# Altium PCB Beacon.PcbDoc
Units mm, origin at the board's own origin, x right, y up, seen from the top; angles counter-clockwise.
Board outline 47.6 x 56 mm, 2 copper layers (Top Layer, Bottom Layer); 50 components, 53 nets, 164 pads, 154 vias.
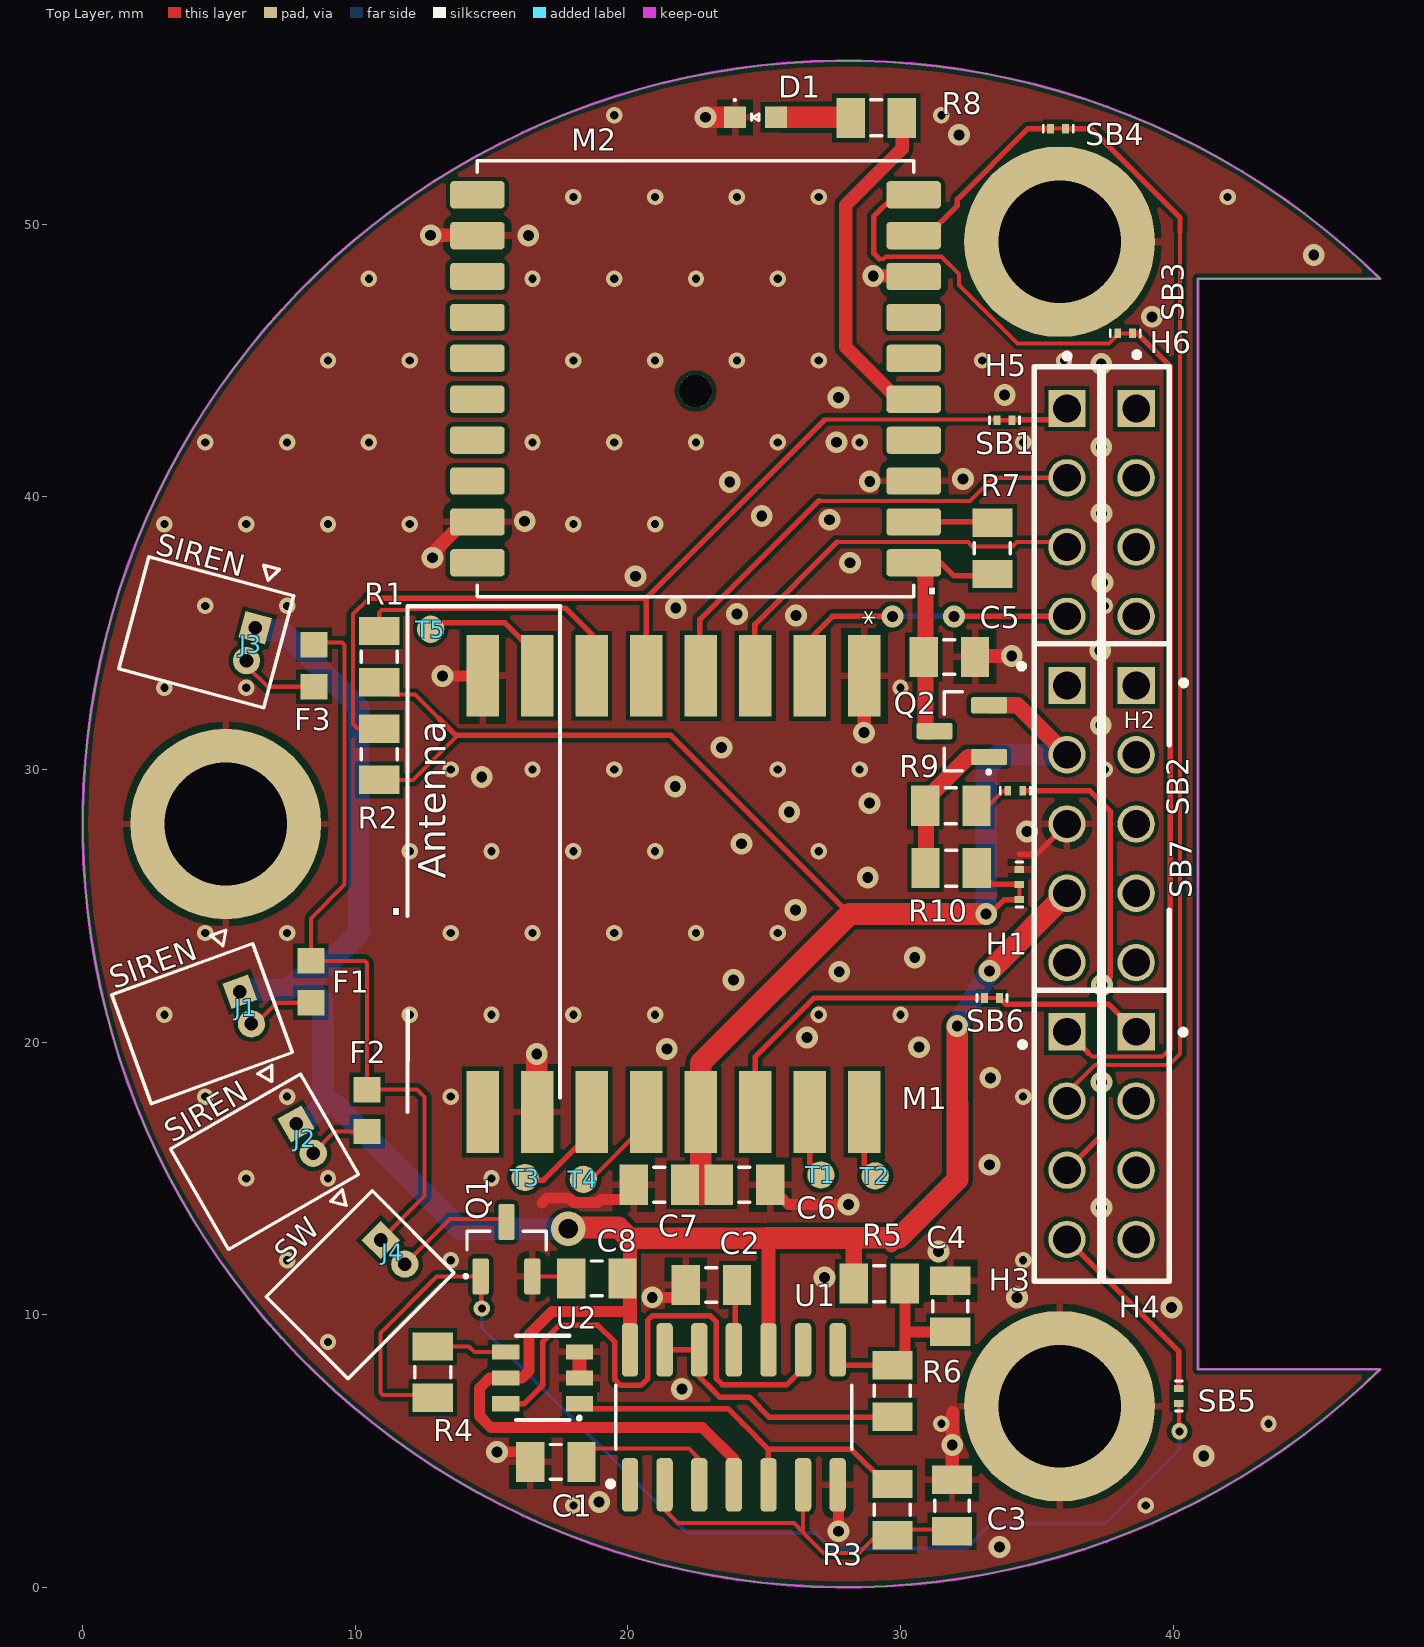
[diagram p0: Top Layer view]
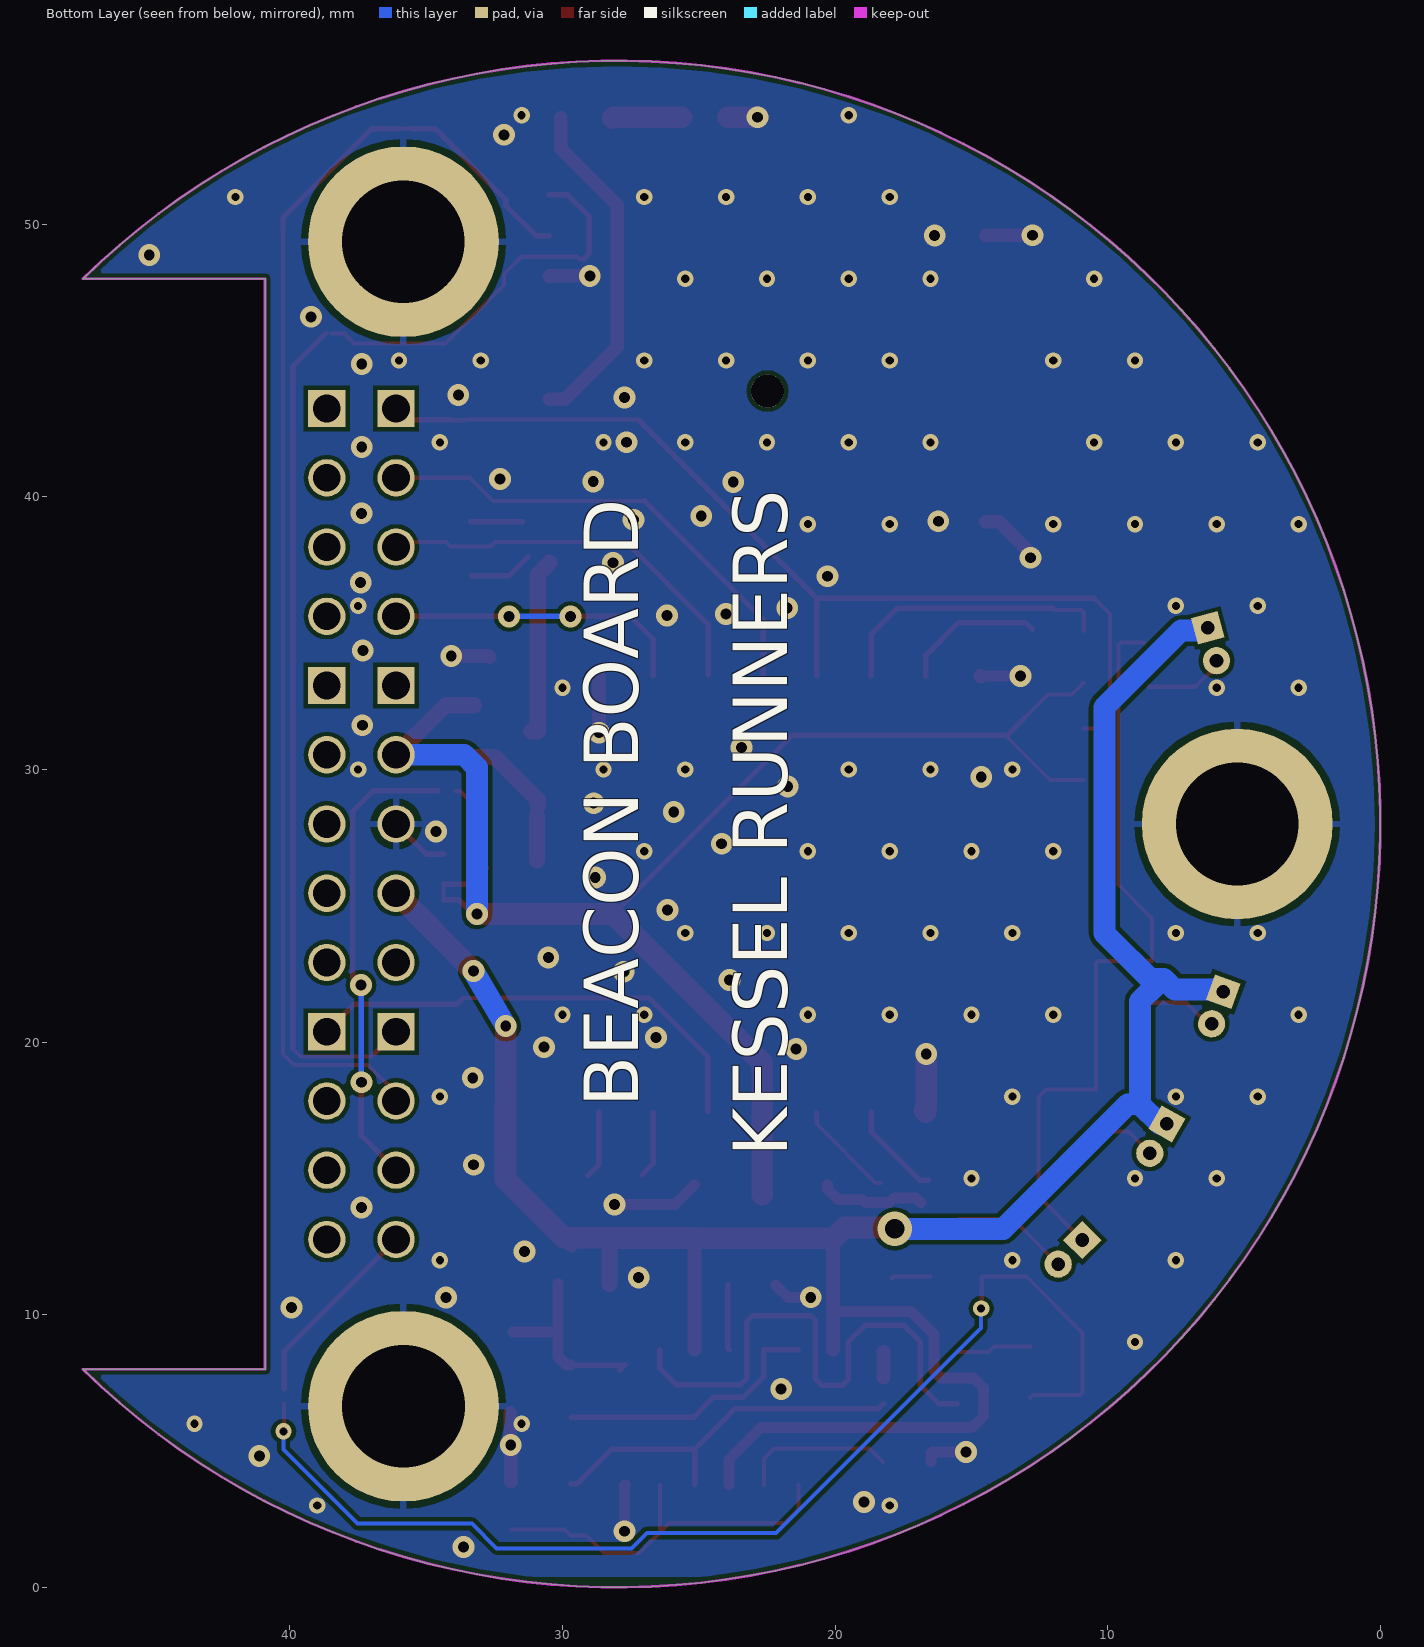
[diagram p1: Bottom Layer view, seen from below]

## Layer stack, top to bottom
Top Solder: solder mask 0.0102, Solder Resist, Dk 3.5
Top Layer: signal copper 0.0356
Dielectric 1: dielectric 0.32, FR-4, Dk 4.8
Bottom Layer: signal copper 0.0356
Bottom Solder: solder mask 0.0102, Solder Resist, Dk 3.5

## Board outline
47.596,8 cw(c28,28) 47.596,48 47.6,48 40.913,48 40.913,8

## Design rules (kind name [scope] priority, off if disabled: settings)
Clearance [All] p1: gap=0.152 ignorepadtopadclearanceinfootprint=FALSE
HoleSize [All] p1: absolutevalues=TRUE maxlimit=6.2 minlimit=0.3 maxpercent=80.000 minpercent=20.000
MinimumAnnularRing [All] p1: minimumring=0.15
MinimumSolderMaskSliver [All] p1: minsoldermaskwidth=0.1
PolygonConnect ViaConnect [IsVia] p1: connectstyle=Direct reliefconductorwidth=0.254 reliefentries=4 polygonreliefangle="90 Angle" airgapwidth=0.254
PolygonConnect [All] p2: connectstyle=Relief reliefconductorwidth=0.254 reliefentries=4 polygonreliefangle="90 Angle" airgapwidth=0.254
RoutingVias [All] p1: holewidth=0.3 width=0.6 viastyle="Through Hole" minholewidth=0.3 minwidth=0.5 maxholewidth=1 maxwidth=5
SilkToSilkClearance [All] p1: silktosilkclearance=0.1
SilkToSolderMaskClearance [IsPad] p1: minsilkscreentomaskgap=0.1 clearancetoexposedcopper=TRUE
SolderMaskExpansion [All] p1: expansion=0.051 istentingtop=FALSE
SupplyNets "Schematic Supply Nets_5" [InNet('GPS_3V3')] p1: voltage=0.000
SupplyNets "Schematic Supply Nets_4" [InNet('5V')] p2: voltage=0.000
SupplyNets "Schematic Supply Nets_3" [InNet('Vbat')] p3: voltage=0.000
SupplyNets "Schematic Supply Nets_2" [InNet('3V3')] p4: voltage=0.000
SupplyNets "Schematic Supply Nets_1" [InNet('GND')] p5: voltage=0.000
SupplyNets "Schematic Supply Nets" [InNet('1V8')] p6: voltage=0.000
Width [All] p1: maxlimit=25.4 minlimit=0.15 preferedwidth=0.3
26 further rules are at their usual default settings.

## Components (designator, comment, footprint, x,y, rotation, side; value= is the part's Value field where it differs from the comment)
C1 "220nF" CAPACITOR_0805_2012M-70N 17.361,4.604 r0 top
C2 "220nF" CAPACITOR_0805_2012M-70N 23.064,11.093 r0 top
C3 "1nF" CAPACITOR_0805_2012M-70N 31.891,2.999 r270 top
C4 "1uF" CAPACITOR_0805_2012M-70N 31.826,10.309 r270 top
C5 "22uF" CAPACITOR_0805_2012M-70N 31.795,34.128 r180 top
C6 "22uF" CAPACITOR_0805_2012M-70N 24.278,14.766 r0 top
C7 "220nF" CAPACITOR_0805_2012M-70N 21.156,14.767 r180 top
C8 "220nF" CAPACITOR_0805_2012M-70N 18.864,11.335 r0 top
D1 "LTST-C190 Series" LED_0603_1608M_0.80mm 24.684,53.922 r0 top
F1 "C2Q-375" FUSC1608X56N 8.371,22.211 r90 top
F2 "C2Q-375" FUSC1608X56N 10.438,17.488 r90 top
F3 "C2Q-375" FUSC1608X56N 8.49,33.805 r90 top
H1 "SSQ-105-03-S-S" SAMTEC_SSQ-105-03-S-S 36.107,28 r270 top
H2 "SSQ-105-03-S-S" SAMTEC_SSQ-105-03-S-S 38.647,28 r270 top
H3 "SSQ-104-02-S-S" *SAMTEC_SSQ-104-02-S-S_SSQ-104-02-S-S(Primary)#1 36.107,16.57 r270 top
H4 "SSQ-104-02-S-S" *SAMTEC_SSQ-104-02-S-S_SSQ-104-02-S-S(Primary)#1 38.647,16.57 r270 top
H5 "SSQ-104-02-S-S" *SAMTEC_SSQ-104-02-S-S_SSQ-104-02-S-S(Primary)#2 36.107,39.43 r270 top
H6 "SSQ-104-02-S-S" *SAMTEC_SSQ-104-02-S-S_SSQ-104-02-S-S(Primary)#2 38.647,39.43 r270 top
J1 "0530480210" MOLEX_0530480210 5.977,21.259 r110 top
J2 "0530480210" MOLEX_0530480210 8.146,16.46 r120 top
J3 "0530480210" MOLEX_0530480210 6.174,34.594 r75 top
J4 "0530480210" MOLEX_0530480210 11.377,12.297 r135 top
M1 "LORA127X-C1" LoRa127X-C1 13.674,33.435 r270 top
M2 "CD-PA1616D" XCVR_CD-PA1616D 22.482,44.331 r180 top
Q1 "AS2312" SOT23-3N-1.15mm 15.549,12.403 r90 top
Q2 "SSM3J328R,LF" SOT23F-3-0.8mm 32.25,31.407 r180 top
R1 "180k" Resistor_0805_2012M-50N 10.881,34.137 r270 top
R2 "180k" Resistor_0805_2012M-50N 10.881,30.557 r270 top
R3 "180k" Resistor_0805_2012M-50N 29.703,2.848 r90 top
R4 "1k" Resistor_0805_2012M-50N 12.842,7.895 r270 top
R5 "1Meg" Resistor_0805_2012M-50N 29.22,11.139 r180 top
R6 "39k" Resistor_0805_2012M-50N 29.703,7.202 r270 top
R7 "180k" Resistor_0805_2012M-50N 33.372,38.11 r270 top
R8 "1k" Resistor_0805_2012M-50N 29.11,53.901 r0 top
R9 "1k" Resistor_0805_2012M-50N 31.85,28.67 r0 top
R10 "39k" Resistor_0805_2012M-50N 31.855,26.379 r180 top
SB1 "Solder Jumper Normally Closed 0201" "SOLDER BRIDGE CLOSED 0201" 33.814,42.81 r0 top net-tie
SB2 "Solder Jumper Normally Open 0201" "SOLDER BRIDGE OPEN 0201" 34.209,29.217 r0 top
SB3 "Solder Jumper Normally Closed 0201" "SOLDER BRIDGE CLOSED 0201" 38.242,45.996 r0 top net-tie
SB4 "Solder Jumper Normally Closed 0201" "SOLDER BRIDGE CLOSED 0201" 35.783,53.507 r0 top net-tie
SB5 "Solder Jumper Normally Open 0201" "SOLDER BRIDGE OPEN 0201" 40.213,7.016 r90 top
SB6 "Solder Jumper Normally Closed 0201" "SOLDER BRIDGE CLOSED 0201" 33.357,21.618 r0 top net-tie
SB7 "Solder Jumper 3-pin Left connected 0201" "SOLDER BRIDGE 3-PIN LEFT SHORTED 0201" 34.363,25.783 r90 top net-tie
T1 "Test Pad" "TEST PAD"#1 27.081,15.125 r0 top
T2 "Test Pad" "TEST PAD"#1 29.074,15.091 r0 top
T3 "Test Pad" "TEST PAD"#1 16.231,15.032 r0 top
T4 "Test Pad" "TEST PAD"#1 18.368,14.964 r0 top
T5 "Test Pad" "TEST PAD"#2 12.768,35.144 r0 top
U1 "TLC556CDR" SOIC-14N-3.9mmBody-1.75mm 23.887,6.234 r90 top
U2 "74LVC1G97W6-7" SOT23-6N-1.4mm 16.873,7.681 r180 top

## Footprints (in the part's own frame and the unit in brackets; to place one, negate y for a bottom-side part, rotate by r counter-clockwise, add the part's x,y. Pads: shape width x height; smd on the part's side, far side on the other; paste and mask are expansions set on the pad)
*SAMTEC_SSQ-104-02-S-S_SSQ-104-02-S-S(Primary)#1 [mm]
  rect 1.37x1.37 hole 1.02: 01(-3.81,0)
  round 1.37 hole 1.02 mask+0.051: 02(-1.27,0)
  round 1.37 hole 1.02: 03(1.27,0) 04(3.81,0)
  silkscreen extent -5.34,-1.73 5.34,1.2
*SAMTEC_SSQ-104-02-S-S_SSQ-104-02-S-S(Primary)#2 [mm]
  rect 1.37x1.37 hole 1.02: 01(-3.81,0)
  round 1.37 hole 1.02: 02(-1.27,0) 03(1.27,0) 04(3.81,0)
  silkscreen extent -5.83,-1.2 5.34,1.2
CAPACITOR_0805_2012M-70N [mm] "Capacitor, 0805 (2012 metric), 0.7mm high, nominal pads,"
  rect 1.04x1.47 smd mask+0.051: 1(-0.94,0) 2(0.94,0)
  silkscreen extent -0.2,-0.64 0.2,0.64, body extent -1,-0.73 1,0.73, height 1.23
FUSC1608X56N [mm]
  rect 0.93x0.99 smd: 1(-0.77,0) 2(0.77,0)
LED_0603_1608M_0.80mm [mm] "LED, 0603 (1608 metric), 0.8mm high"
  rect 0.8x0.8 smd mask+0.051: A(0.75,0) C(-0.75,0)
  silkscreen extent -0.79,-0.12 0.13,0.66, body extent -0.8,-0.4 0.8,0.4, height 0.8
LoRa127X-C1 [mm]
  rect 3x1.2 smd paste-10 mask+0: 1(0,15) 2(0,13) 3(0,11) 4(0,9) 5(0,7) 6(0,5) 7(0,3) 8(0,1) 9(16,1) 10(16,3) 11(16,5) 12(16,7) 13(16,9) 14(16,11) 15(16,13) 16(16,15)
  body extent 0,0 16,16, height 2.1
MOLEX_0530480210 [mm]
  rect 1x1 hole 0.5 mask+0.051: 1(0.625,0)
  round 1 hole 0.5 mask+0.051: 2(-0.625,0)
  silkscreen extent -2.13,-1.05 2.93,4.45, body extent -2.13,-1.08 2.12,4.42, height 3.56
Resistor_0805_2012M-50N [mm] "Resistor, 0805 (2012 metric), nominal pads"
  rect 1.04x1.47 smd mask+0.051: 1(-0.94,0) 2(0.94,0)
  silkscreen extent -0.2,-0.66 0.2,0.66, body extent -1,-0.63 1,0.62, height 0.5
SAMTEC_SSQ-105-03-S-S [mm]
  rect 1.37x1.37 hole 1.02: 1(-5.08,0)
  round 1.37 hole 1.02: 2(-2.54,0) 3(0,0) 4(2.54,0)
  round 1.37 hole 1.02 mask+0.051: 5(5.08,0)
  silkscreen extent -6.61,-1.76 6.61,1.2, body extent -6.6,-1.21 6.6,1.21, height 8.51
SOIC-14N-3.9mmBody-1.75mm [mm] "14-SOIC, 3.9mm body width, nominal pads, 1.75mm high"
  rrect50% 1.97x0.6 smd: 1(-2.475,3.81) 2(-2.475,2.54) 3(-2.475,1.27) 4(-2.475,0) 5(-2.475,-1.27) 6(-2.475,-2.54) 7(-2.475,-3.81) 8(2.475,-3.81) 9(2.475,-2.54) 10(2.475,-1.27) 11(2.475,0) 12(2.475,1.27) 13(2.475,2.54) 14(2.475,3.81)
  silkscreen extent -2.54,-4.33 1.17,4.62, body extent -3,-4.33 3,4.32, height 1.75
"SOLDER BRIDGE 3-PIN LEFT SHORTED 0201" [mm]
  rect 0.25x0.35 smd paste-100 mask+0: 1(0,0) 2(-0.55,0) 3(0.55,0)
  Top Layer lines w0.15: -0.475,0 -0.05,0
  silkscreen extent -0.82,-0.13 0.83,0.13
"SOLDER BRIDGE CLOSED 0201" [mm]
  rect 0.25x0.35 smd paste-100 mask+0: 1(-0.275,0) 2(0.275,0)
  Top Layer lines w0.15: -0.225,0 0.225,0
  silkscreen extent -0.55,-0.13 0.55,0.13
"SOLDER BRIDGE OPEN 0201" [mm]
  rect 0.25x0.35 smd paste-100 mask+0: 1(-0.275,0) 2(0.275,0)
  silkscreen extent -0.55,-0.13 0.55,0.13
SOT23-3N-1.15mm [mm] "SOT23, 3-pin, 1.15mm high, nominal pads"
  rrect25% 1.32x0.6 smd mask+0.051: 1(-1,0.95) 2(-1,-0.95) 3(1,0)
  silkscreen extent -1.02,-1.45 0.65,1.52, body extent -1.19,-1.45 1.21,1.45, height 0.91
SOT23-6N-1.4mm [mil] "SOT23, 6 pins, nominal pads, 1.4mm high"
  rect 39.5x22 smd paste+0 mask+2: 1(-53.25,37.4) 2(-53.25,0) 3(-53.25,-37.4) 4(53.25,-37.4) 5(53.25,0) 6(53.25,37.4)
  silkscreen extent -54,-61 38,61, body extent -59,-61 59,61, height 55
SOT23F-3-0.8mm [mm] "SOT23, 3-pin, flat leads, 0.8mm high"
  rrect25% 1.32x0.6 smd mask+0.051: 1(-1,0.95) 2(-1,-0.95) 3(1,0)
  silkscreen extent -1.02,-1.45 0.65,1.52, body extent -1.2,-1.4 1.2,1.4, height 0.88
"TEST PAD"#1 [mm] "Exposed copper pad"
  round 1 smd mask+0.051: 1(0,0)
"TEST PAD"#2 [mm] "Exposed copper pad"
  round 1 smd: 1(0,0)
XCVR_CD-PA1616D [mm]
  rrect25% 2x1 smd: 1(-8,6.75) 2(-8,5.25) 3(-8,3.75) 4(-8,2.25) 5(-8,0.75) 6(-8,-0.75) 7(-8,-2.25) 8(-8,-3.75) 9(-8,-5.25) 10(-8,-6.75) 11(8,-6.75) 12(8,-5.25) 13(8,-3.75) 14(8,-2.25) 15(8,-0.75) 16(8,0.75) 17(8,2.25) 18(8,3.75) 19(8,5.25) 20(8,6.75)
  round 1.21 hole 1.21 unplated: ""(0,0.45)
  silkscreen extent -8,-8 8,8, body extent -8,-8 8,8, height 6.7

## Part data
C1 C2 C7 C8: library part C0805C224K1RAC7800, "Passive - Capacitor, X7R, 220nF Max, 100V, 0805 (2012 Metric), ±10%, -55°C ~ 85°C. 200nF @ 10V, 110nF @ 50V, 55nF @ 100V", Capacitance at Rated Voltage=25%, Package=0805, Rated Voltage=100V, Supplier 1 Part No.=399-C0805C224K1RAC7800CT-ND, Temp Range="-55°C ~ 85°C", Temperature Coefficient=X7R, Tolerance=±10%, APSS Standard Part="APSS Standard", MF Part No.=C0805C224K1RAC7800, Supplier 1=Digikey
C3: library part "GCM2165CxxxxxF Series", "Passive - Capacitor Series, 0805, C0G, 50V, ±1%, -55°C ~ 125°C, 0805 (2012 Metric)", Capacitance at Rated Voltage=100%, MF Part No.=GCM2165C1H102FA16D, Package=0805, Rated Voltage=50V, Temp Range="-55°C ~ 125°C", Temperature Coefficient=C0G, Tolerance=±1%, Value Range="5pF ~ 22nF", APSS Standard Part="APSS Standard", E Series=E24, Supplier 1=Digikey
C4: library part "Generic Capacitor", "Generic Capacitor", MF Part No.=C0805C105K3PACTU, Package=0805, Rated Voltage=50V, Supplier 1 Part No.=399-C0805C105K3PAC7800CT-ND, Temp Range="-55°C ~ 85°C", Temperature Coefficient=X5R, Tolerance=±10%, Supplier 1=Digikey
C5 C6: library part C0805C226M9PACTU, "Passive - Capacitor, X5R, 22uF Max, 6.3V, 0805 (2012 Metric), ±20%, -55°C ~ 85°C. 8.8uF @ 5V", Capacitance at Rated Voltage=30%, Package=0805, Rated Voltage=6.3V, Supplier 1 Part No.=399-C0805C226M9PAC7800CT-ND, Temp Range="-55°C ~ 85°C", Temperature Coefficient=X5R, Tolerance=±20%, APSS Standard Part="APSS Standard", MF Part No.=C0805C226M9PACTU, Supplier 1=Digikey
D1: "Diode - LED, 0603", Colour=Green, MF Part No.=LTST-C190KGKT, Package=0603, Rated Voltage="5V Reverse", Temp Range="-30°C ~ 85°C", APSS Standard Part="APSS Standard", Supplier 1=Digikey
F1 F2 F3: Package=None, Availability=Unavailable, MP=C2Q-375, Price=None
J1 J2 J3 J4: "Header - Picoblade 02-pin, TH, RA", Supplier 1 Part No.=WM1742-ND, APSS Standard Part="APSS Standard", MF Part No.=0530480210, Mounting Type=Through-hole, Orientation="Right Angle", Pins=2, Pitch=1.25mm, Supplier 1=Digikey
M1: "LoRa transceiver", MF Part No.=LORA127X-C1
M2: "CD-PA1616D GNSS patch antenna module", MF Part No.=CD-PA1616D
Q1: "Transistor - MOSFET, N-Channel AS2312", Package=SOT23-3, Power=1.2W, Rated Voltage="20 Vds", Supplier 1 Part No.=4530-AS2312CT-ND, Temp Range="0°C ~ 150°C (TJ)", APSS Standard Part="APSS Standard", MF Part No.=AS2312, Supplier 1=Digikey
Q2: "Transistor - MOSFET, P-Channel SSM3J328R,LF", Package=SOT23-3, Power=1W, Rated Voltage="20 Vds", Supplier 1 Part No.=SSM3J328RLFCT-ND, Temp Range="0°C ~ 150°C (TJ)", APSS Standard Part="APSS Standard", MF Part No.=SSM3J328R,LF, Supplier 1=Digikey
R1 R2 R3 R7: library part "RMCF0805JT Series", "Passive - Resistor Series, 0805, 5%, 100m - 22M, E24, 0.063W, 1/16W, ±200ppm/°C, -55°C ~ 155°C, 0805 (2012 Metric)", MF Part No.=RMCF0805JT180K, Package=0805, Power=1/8W, Rated Voltage=150V, Temp Range="-55°C ~ 155°C", Temperature Coefficient=±200ppm/°C, Tolerance=5%, Value Range="100m ~ 22M", APSS Standard Part="APSS Standard", E Series=E24, Supplier 1=Digikey
R4 R8 R9: library part "RMCF0805JT Series", "Passive - Resistor Series, 0805, 5%, 100m - 22M, E24, 0.063W, 1/16W, ±200ppm/°C, -55°C ~ 155°C, 0805 (2012 Metric)", MF Part No.=RMCF0805JT1K00, Package=0805, Power=1/8W, Rated Voltage=150V, Temp Range="-55°C ~ 155°C", Temperature Coefficient=±200ppm/°C, Tolerance=5%, Value Range="100m ~ 22M", APSS Standard Part="APSS Standard", E Series=E24, Supplier 1=Digikey
R5: library part "RMCF0805JT Series", "Passive - Resistor Series, 0805, 5%, 100m - 22M, E24, 0.063W, 1/16W, ±200ppm/°C, -55°C ~ 155°C, 0805 (2012 Metric)", MF Part No.=RMCF0805JT1M00, Package=0805, Power=1/8W, Rated Voltage=150V, Temp Range="-55°C ~ 155°C", Temperature Coefficient=±200ppm/°C, Tolerance=5%, Value Range="100m ~ 22M", APSS Standard Part="APSS Standard", E Series=E24, Supplier 1=Digikey
R6 R10: library part "RMCF0805JT Series", "Passive - Resistor Series, 0805, 5%, 100m - 22M, E24, 0.063W, 1/16W, ±200ppm/°C, -55°C ~ 155°C, 0805 (2012 Metric)", MF Part No.=RMCF0805JT39K0, Package=0805, Power=1/8W, Rated Voltage=150V, Temp Range="-55°C ~ 155°C", Temperature Coefficient=±200ppm/°C, Tolerance=5%, Value Range="100m ~ 22M", APSS Standard Part="APSS Standard", E Series=E24, Supplier 1=Digikey
SB7: library part "Solder Jumper 3-pin Normally Closed 0201", DEBUG=DEBUG
U1: "IC - Timer, 2-Channel, 2.1-MHz, 2x720uA, 14-SOIC, 0 to 70", Package=SOIC-14, Rated Voltage=15V, Supplier 1 Part No.=296-1338-1-ND, Temp Range="0°C ~ 70°C", APSS Standard Part="APSS Standard", MF Part No.=TLC556CDR, Supplier 1=Digikey
U2: "IC - Multifunction Logic Gate, 1 Circuit, 3 Input, 1.65 - 5.5V, AND, OR, NOT, MUX, SOT-23-6", Package=SOT-23-6, Rated Voltage=5.5V, Temp Range="-40°C ~ 125°C", APSS Standard Part="APSS Standard", MF Part No.=74LVC1G97W6-7, Supplier 1=Digikey, Supplier 1 Part No.=74LVC1G97W6-7
H1 H2: MF Part No.=SSQ-105-03-S-S
SB1 SB2 SB3 SB4 SB5 SB6: DEBUG=DEBUG

## Free pads (board coordinates)
  round 7 hole 4.5 mask+0.051: 1(5.25,28)
  round 7 hole 4.5: 1(35.837,6.643) 1(35.837,49.357)

## Via types
v1: diameter 0.6, hole 0.3, Top Layer to Bottom Layer, tented top, 81 vias
v2: diameter 0.8, hole 0.4, Top Layer to Bottom Layer, tented both sides, 66 vias
v3: diameter 0.8, hole 0.4, Top Layer to Bottom Layer, tented bottom, 4 vias
v4: diameter 0.6, hole 0.3, Top Layer to Bottom Layer, 2 vias
v5: diameter 1.27, hole 0.711, Top Layer to Bottom Layer, 1 vias

## Nets (pads, with @x,y where several pads share a name; then routed paths per layer and width w, separated by ;. In a path a pad name is that pad's centre, name@x,y a point inside that pad or via, vN(x,y) a via of type N, cw(c..) or ccw(c..) an arc to the next point about the centre after c; other vN are vias at no path point)
1V8: H1.1
1V8_EN: H2.3
1V8_PG: H2.1
3V3: C6.1 C7.1 H1.2 M1.13 Q2.2 R1.2 R2.2 SB7.2 | length 55.7
  Top Layer w0.15: R2.2 12.123,29.617 13.678,31.172 13.678,31.263 ; R1.2 11.326,32.752 12.189,32.752 13.073,31.868
  Top Layer w0.2: 13.073,31.868 13.678,31.263 21.571,31.263 28.135,24.699 ; v3(33.143,24.699) 33.279,24.699 33.8,25.22 SB7.2@34.363,25.22
  Top Layer w0.6: Q2.2 34.29,32.357 H1.2
  Top Layer w0.8: 22.674,14.411 M1.13 22.674,19.239 28.135,24.699 v3(33.143,24.699) ; H1.2@35.806,30.54 H1.2
  Bottom Layer w0.8: v3(33.143,24.699) 33.143,30.071 33.612,30.54 H1.2
3V3_EN: H2.4
3V3_PG: H2.2
5V: C8.2 H1.4 J1.1 J2.1 J3.1 R5.2 U1.4 U1.10 U1.14 U2.5 | length 92.8
  Top Layer w0.4: 20.077,10.12 17.218,10.12 16.374,9.276 16.374,7.938 16.118,7.681 U2.5 14.929,7.681 14.552,7.304 14.552,6.278 14.974,5.855 22.733,5.855 23.887,4.702 U1.4
  Top Layer w0.5: 20.058,12.798 20.077,12.779 20.077,10.12 U1.14@20.077,8.722 ; 25.11,12.81 25.157,12.763 U1.10 ; 29.672,12.539 29.953,12.82
  Top Layer w0.6: R5.2 28.28,12.611 28.486,12.817
  Top Layer w0.8: v5(17.809,13.146) 17.867,13.204 19.652,13.204 20.058,12.798 25.11,12.81 28.486,12.817 29.953,12.82 32.095,14.971 v2(32.082,20.593) ; v3(33.268,22.603) H1.4
  Bottom Layer w0.8: J1.1 5.841,21.924 7.546,21.924 7.948,22.326 8.458,22.326 ; J3.1 6.43,35.103 7.305,35.103 10.125,32.283 10.125,23.993 8.226,22.093 8.82,21.499 8.82,17.722 ; J2.1 8.1,17.002 8.82,17.722 ; v5(17.809,13.146) 13.84,13.146 9.264,17.722 8.82,17.722 ; v2(32.082,20.593) v3(33.268,22.603)
5V_EN: H2.5
G\P\S\_\E\N\: R9.2 SB2.1 | length 1
  Top Layer w0.15: R9.2@33.167,28.629 33.755,29.217 SB2.1
GND: C1.1 C2.1 C3.1 C4.1 C5.1 C6.2 C7.2 C8.1 D1.C H1.3 M1.1 M1.8 M1.10 M2.3 M2.8 M2.12 M2.19 pad.1 Q1.2 SB7.3 U1.7 U2.2 U2.3 | length 32.9
  Top Layer w0.15: Q1.2 17.856,11.403 C8.1
  Top Layer w0.2: 34.363,26.883 34.99,26.883 H1.3
  Top Layer w0.4: v2(13.201,33.425) 14.636,33.425 M1.8@14.65,33.411 ; v2(15.195,4.959) 16.423,4.959 16.481,4.901 C1.1@16.481,4.604 ; 16.851,14.1 17.039,14.288 17.839,14.288 18.015,14.112 18.895,14.112 19.016,14.232 19.896,14.232 20.276,14.612 C7.2@20.276,14.767 ; v2(20.894,10.638) 21.729,10.638 C2.1@22.184,11.093 ; C6.2@25.158,14.766 25.886,14.037 v2(28.091,14.037) ; U1.7 27.726,3.73 v2(27.726,2.057)
  Top Layer w0.5: v2(12.766,49.595) 14.468,49.595 M2.12 ; v2(12.834,37.767) 12.891,37.825 12.891,37.99 13.982,39.081 M2.19 ; M1.8@14.65,33.411 M1.8 ; U2.2 U2.3 ; v2(28.665,31.351) 28.665,33.426 M1.1 ; v2(29,48.104) 30.459,48.104 M2.8 ; C3.1@31.891,3.879 31.9,3.888 v2(31.9,5.215) ; v2@31.917,5.232 31.917,6.372 31.917,6.398 ; C5.1@32.675,34.128 32.712,34.164 v2(34.083,34.164)
  Top Layer w0.8: v2(16.658,19.565) 16.658,17.559 16.728,17.489 M1.10 ; v2(22.847,53.924) 23.924,53.924 D1.C@23.926,53.922
  other v1: 18,3 39,3 31.5,6 43.5,6 9,9 7.5,12 13.5,12 34.5,12 6,15 9,15 15,15 4.5,18 7.5,18 13.5,18 34.5,18 3,21 12,21 15,21 18,21 21,21 27,21 30,21 4.5,24 7.5,24 13.5,24 16.5,24 19.5,24 22.5,24 25.5,24 12,27 15,27 18,27 21,27 27,27 13.5,30 16.5,30 19.5,30 25.5,30 28.5,30 37.5,30 3,33 6,33 30,33 4.5,36 7.5,36 37.5,36 3,39 6,39 9,39 12,39 18,39 21,39 4.5,42 7.5,42 10.5,42 16.5,42 19.5,42 22.5,42 25.5,42 28.5,42 34.5,42 9,45 12,45 18,45 21,45 24,45 27,45 33,45 36,45 10.5,48 16.5,48 19.5,48 22.5,48 25.5,48 18,51 21,51 24,51 27,51 42,51 19.5,54 31.5,54
  other v2: 33.63,1.476 18.947,3.134 41.123,4.82 21.98,7.277 39.941,10.259 34.27,10.631 27.208,11.367 31.391,12.319 37.379,13.938 33.26,15.501 33.295,18.689 21.429,19.745 30.681,19.813 26.568,20.168 23.878,22.282 27.753,22.582 30.522,23.105 26.148,24.85 28.801,26.034 24.163,27.274 34.638,27.725 25.919,28.438 28.858,28.763 21.739,29.374 14.641,29.726 23.438,30.805 37.345,31.622 37.325,34.369 26.163,35.654 23.999,35.706 21.757,35.927 37.405,36.858 20.284,37.088 28.145,37.583 16.216,39.107 27.402,39.16 24.912,39.304 37.375,39.396 23.739,40.542 28.872,40.565 32.291,40.655 37.365,41.834 27.649,42.002 27.728,43.645 33.822,43.732 37.365,44.87 39.226,46.604 45.161,48.873 16.349,49.586 32.143,53.28
"GPS R\e\s\e\t\": M2.2 R7.1 | length 1.9
  Top Layer w0.2: 31.482,39.081 R7.1@33.372,39.081
GPS_3V3: C5.2 M2.1 Q2.3 R7.2 | length 9
  Top Layer w0.2: M2.1@31.251,37.812 31.963,37.1 R7.2@33.325,37.1
  Top Layer w0.6: M2.1 30.915,37.148 30.915,31.407 Q2.3@31.15,31.407
GPS_UART_RX: M2.10 SB3.1 | length 13.9
  Top Layer w0.15: 29.23,48.731 29.384,48.731 29.461,48.809 31.503,48.809 32.144,48.168 32.144,47.779 34.293,45.63 37.651,45.63 37.967,45.946 SB3.1
  Top Layer w0.2: 29.23,48.731 29.027,48.934 29.027,50.297 29.811,51.081 M2.10
GPS_UART_TX: M2.9 SB4.1 | length 6.8
  Top Layer w0.2: M2.9 30.982,49.581 32.085,50.684 32.085,50.912 34.68,53.507 SB4.1
I2C_SCL: M2.14
I2C_SDA: M2.15
"LoRa Antenna": M1.9
"LoRa C\S\": M1.5 R2.1 SB1.1 | length 34.5
  Top Layer w0.15: 10.496,36.274 9.919,35.697 9.919,31.66 10.082,31.497 R2.1 ; 27.202,42.834 SB1.1@33.552,42.834
  Top Layer w0.2: 10.496,36.274 20.668,36.274 ; M1.5 20.674,36.268 20.668,36.274 ; 27.202,42.809 20.668,36.274
"LoRa IRQ": M1.14 SB6.1 | length 11.3
  Top Layer w0.2: M1.14 24.674,19.465 26.827,21.618 SB6.1
"LoRa R\e\s\e\t\": M1.6 R1.1 | length 10.5
  Top Layer w0.15: R1.1 10.881,35.757 10.969,35.845 11.943,35.845 12.02,35.922
  Top Layer w0.2: 12.02,35.922 17.714,35.922 18.674,34.961 M1.6
"Manual Buzzer Control": Q1.1 R4.2 SB5.1 | length 42.8
  Top Layer w0.15: R4.2 12.742,7.055 11.01,7.055 10.922,7.143 10.922,9.336 12.989,11.403 Q1.1 14.622,11.38 14.622,10.251 v4(14.645,10.227) ; SB5.1 40.224,6.731 40.224,5.732 v4(40.235,5.721)
  Bottom Layer w0.15: v4(14.645,10.227) 14.645,9.515 22.173,1.986 26.909,1.986 27.466,1.429 32.418,1.429 33.322,2.334 37.519,2.334 40.235,5.049 v4(40.235,5.721)
MISO: H5.04 M1.2 | length 11.1
  Top Layer w0.2: M1.2 26.674,34.789 27.505,35.62 27.511,35.614 v3(29.706,35.614) ; v3(31.959,35.614) 36.101,35.614 H5.04
  Bottom Layer w0.2: v3(29.706,35.614) v3(31.959,35.614)
MOSI: H5.03 M1.3 | length 14.7
  Top Layer w0.15: 27.675,38.34 32.471,38.34 32.628,38.183 34.116,38.183 34.273,38.34 H5.03@35.927,38.34
  Top Layer w0.2: M1.3@24.661,33.477 24.661,35.326 27.675,38.34 ; H5.03@35.927,38.34 H5.03
NetC1_2: C1.2 U1.3 | length 5.7
  Top Layer w0.15: C1.2@18.241,4.604 18.733,5.096 22.237,5.096 22.617,4.716 U1.3
NetC2_2: C2.2 U1.11 | length 2.4
  Top Layer w0.2: U1.11 23.944,8.766 C2.2@23.944,11.093
NetC3_2: C3.2 R3.1 U1.2 U1.6 | length 14.2
  Top Layer w0.15: U1.2 21.347,2.849 21.84,2.356 26.087,2.356 26.427,2.016 ; U1.6 26.427,2.016 ; C3.2@31.891,2.119 29.925,2.119 29.703,1.898 29.119,1.898 28.486,1.265 27.178,1.265 26.427,2.016
NetC4_2: C4.2 R5.1 R6.1 U1.8 | length 7.2
  Top Layer w0.2: U1.8@27.697,8.17 U1.8@27.715,8.152 ; U1.8@27.893,7.974 U1.8@27.715,8.152 ; R6.1@29.703,8.152 U1.8@27.715,8.152
  Top Layer w0.4: R6.1@29.703,8.152 29.85,8.152 30.16,8.462 30.16,9.44 ; R5.1 30.16,9.44 ; C4.2 30.231,9.369 30.16,9.44
NetD1_A: D1.A R8.1 | length 2.5
  Top Layer w0.8: D1.A@25.634,53.922 28.139,53.922 R8.1@28.16,53.901
NetF1_1: F1.1 J1.2 | length 2.5
  Top Layer w0.15: J1.2 6.342,20.671 7.112,21.441 F1.1
NetF1_2: F1.2 F2.2 F3.2 J4.1 | length 27.9
  Top Layer w0.15: F3.2@8.661,34.652 8.662,34.654 9.518,34.654 9.606,34.566 9.606,25.774 8.371,24.539 F1.2 10.35,22.981 10.438,22.894 F2.2 12.267,18.258 12.547,17.978 12.547,14.35 J4.1
NetF2_1: F2.1 J2.2 | length 2.3
  Top Layer w0.15: J2.2 8.459,15.93 9.247,16.718 F2.1
NetF3_1: F3.1 J3.2 | length 3
  Top Layer w0.15: J3.2 6.012,33.797 6.774,33.035 F3.1
NetH3_01: H3.01 SB3.2 | length 31
  Top Layer w0.15: 36.888,19.599 37.019,19.468 39.607,19.468 39.901,19.761
  Top Layer w0.2: H3.01 36.888,19.599 ; 38.691,45.996 39.901,44.786 39.901,19.761
NetH3_02: H3.02 SB4.2 | length 41.3
  Top Layer w0.15: H3.02@36.107,18.123 36.107,18.141 37.131,19.165 39.851,19.165 40.254,19.567 40.254,49.725
  Top Layer w0.2: SB4.2 36.995,53.507 40.254,50.248 40.254,49.725 ; H3.02 H3.02@36.107,18.123
NetH3_03: H3.03 SB2.2 | length 17.4
  Top Layer w0.2: SB2.2@34.584,29.217 36.951,29.217 37.694,28.474 37.694,22.395 v2(37.388,22.089) ; H3.03 37.379,16.572 v2(37.379,18.526)
  Bottom Layer w0.2: v2(37.379,18.526) 37.379,18.448 37.388,18.457 v2(37.388,22.089)
NetH3_04: H3.04 SB5.2 | length 7.2
  Top Layer w0.2: H3.04 40.213,8.654 SB5.2
NetH4_01: H4.01 SB6.2 | length 5.5
  Top Layer w0.2: SB6.2 33.869,21.381 37.646,21.381 H4.01
NetH5_01: H5.01 SB1.2 | length 2.2
  Top Layer w0.2: SB1.2@34.089,42.825 35.692,42.825 H5.01
NetJ4_2: J4.2 Q1.3 | length 4.5
  Top Layer w0.15: J4.2 13.475,13.511 15.441,13.511 Q1.3
NetM1_7: M1.7 T5.1 | length 5.2
  Top Layer w0.2: T5.1@12.773,35.145 13.003,35.374 15.486,35.374 16.674,34.186 M1.7
NetM1_11: M1.11 T3.1 | length 3.6
  Top Layer w0.2: T3.1@16.557,14.934 16.912,14.934 18.674,16.697 M1.11
NetM1_12: M1.12 T4.1 | length 3.7
  Top Layer w0.15: T4.1@18.328,14.836 18.519,14.836 20.674,16.992 M1.12
NetM1_15: M1.15 T1.1 | length 2.5
  Top Layer w0.2: M1.15 26.674,15.538 T1.1@27.086,15.126
NetM1_16: M1.16 T2.1 | length 2.5
  Top Layer w0.2: M1.16 28.674,15.496 T2.1@29.078,15.092
NetM2_5: M2.5 R8.2 | length 12.5
  Top Layer w0.5: R8.2@30.06,53.901 30.06,52.767 27.994,50.701 27.994,45.497 29.91,43.581 M2.5
NetQ2_1: Q2.1 R9.1 R10.2 | length 4.9
  Top Layer w0.6: R9.1 30.91,28.88 32.487,30.457 Q2.1 Q2.1@33.35,30.457 ; R10.2@30.936,26.675 R9.1@30.936,28.298
NetR3_2: R3.2 U1.5 U2.1 | length 14
  Top Layer w0.2: U2.1@18.225,6.741 18.412,6.555 23.666,6.555 24.196,6.025 25.157,5.064 ; U1.5 25.157,5.064 ; R3.2@29.703,3.798 29.478,3.798 28.212,5.064 25.157,5.064
NetR4_1: R4.1 U2.4 | length 2.8
  Top Layer w0.15: R4.1 14.164,8.835 14.368,8.631 U2.4
NetR6_2: R6.2 U1.12 U1.13 | length 9.9
  Top Layer w0.2: U1.13 U1.12 22.617,7.726 23.114,7.229 ; 23.114,7.229 23.367,6.976 24.459,6.976 25.197,6.238 R6.2@29.689,6.238
NetR10_1: R10.1 SB7.1 | length 1.8
  Top Layer w0.2: R10.1@32.805,26.379 33.402,25.783 SB7.1
NetU1_9: U1.9 U2.6 | length 20.3
  Top Layer w0.2: U2.6 16.191,6.731 16.884,7.424 16.884,9.017 17.488,9.621 18.894,9.621 19.521,8.994 19.521,7.619 19.736,7.404 20.478,7.404 20.735,7.661 20.735,9.805 20.899,9.969 23.014,9.969 23.236,9.747 23.236,7.664 23.466,7.434 25.837,7.434 26.427,8.024 U1.9
SCK: H5.02 M1.4 | length 17.8
  Top Layer w0.15: 26.995,39.854 32.544,39.854 33.39,40.7 H5.02
  Top Layer w0.2: M1.4@22.644,33.368 22.644,35.503 26.995,39.854
Vbat: H1.5
pads on no net: H4.02 H4.03 H4.04 H6.01 H6.02 H6.03 H6.04 M2. M2.4 M2.6 M2.7 M2.11 M2.13 M2.16 M2.17 M2.18 M2.20 U1.1

## Polygon pours and split planes (outlines as drawn)
GND on Top Layer "Top GND" (solid, remove dead copper, pour order 0): 16.166,56.289 38.255,56.289 49.461,47.016 41.351,47.016 41.351,8.438 48.561,8.438 40.123,0 15.89,0 0.094,15.797 0.094,40.216
GND on Bottom Layer "Bottom GND" (solid, remove dead copper, pour order 4): 2.205,57.363 48.37,57.363 48.37,7.375 41.376,0.382 4.39,0.382 0.119,4.653 0.119,50.322

## Keep-outs
Keep-Out Layer:
  the board outline again, w0.1

## Silkscreen, mask and mechanical layers (free items; w line width, h text height)
Top Overlay:
  lines w0.15: 11.916,17.436 11.926,21.136 ; 11.919,24.624 11.919,35.988 17.519,35.988 ; 17.516,17.975 17.516,35.975
  lines w0.2: 39.852,21.905 39.852,24.829
  text "SIREN" at 2.622,37.911 h0.8 r345
  text "." at 30.835,36.411 h1.52
  text "Antenna" at 13.311,26.001 h1 r90
  text "." at 11.179,24.653 h1.52
  text "SIREN" at 1.164,21.939 h0.8 r20
  text "SIREN" at 3.289,16.294 h0.8 r30
  text "SW" at 7.498,11.83 h0.8 r45
Bottom Overlay:
  text "BEACON BOARD" at 27.232,17.601 h2 r270
  text "KESSEL RUNNERS" at 21.759,15.802 h2 r270
Mechanical 1:
  text "Battery cutout" at 46.172,24.284 h1.52 r90
Mechanical 15:
  lines w0.254: 41.46,9.025 41.46,47.025 49.46,47.025 49.46,9.025 41.46,9.025

## Text inside footprints (layer, text, board x,y; h text height)
M1: Top Overlay "*" at 28.274,35.835 h0.8 r270